# Altium PCB PCB1.PcbDoc
Units mm, origin at the board's own origin, x right, y up, seen from the top; angles counter-clockwise.
Board outline 80 x 43 mm, 2 copper layers (Top Layer, Bottom Layer); 76 components, 65 nets, 258 pads, 118 vias.
Unrouted connection lines stored in the file: 42.
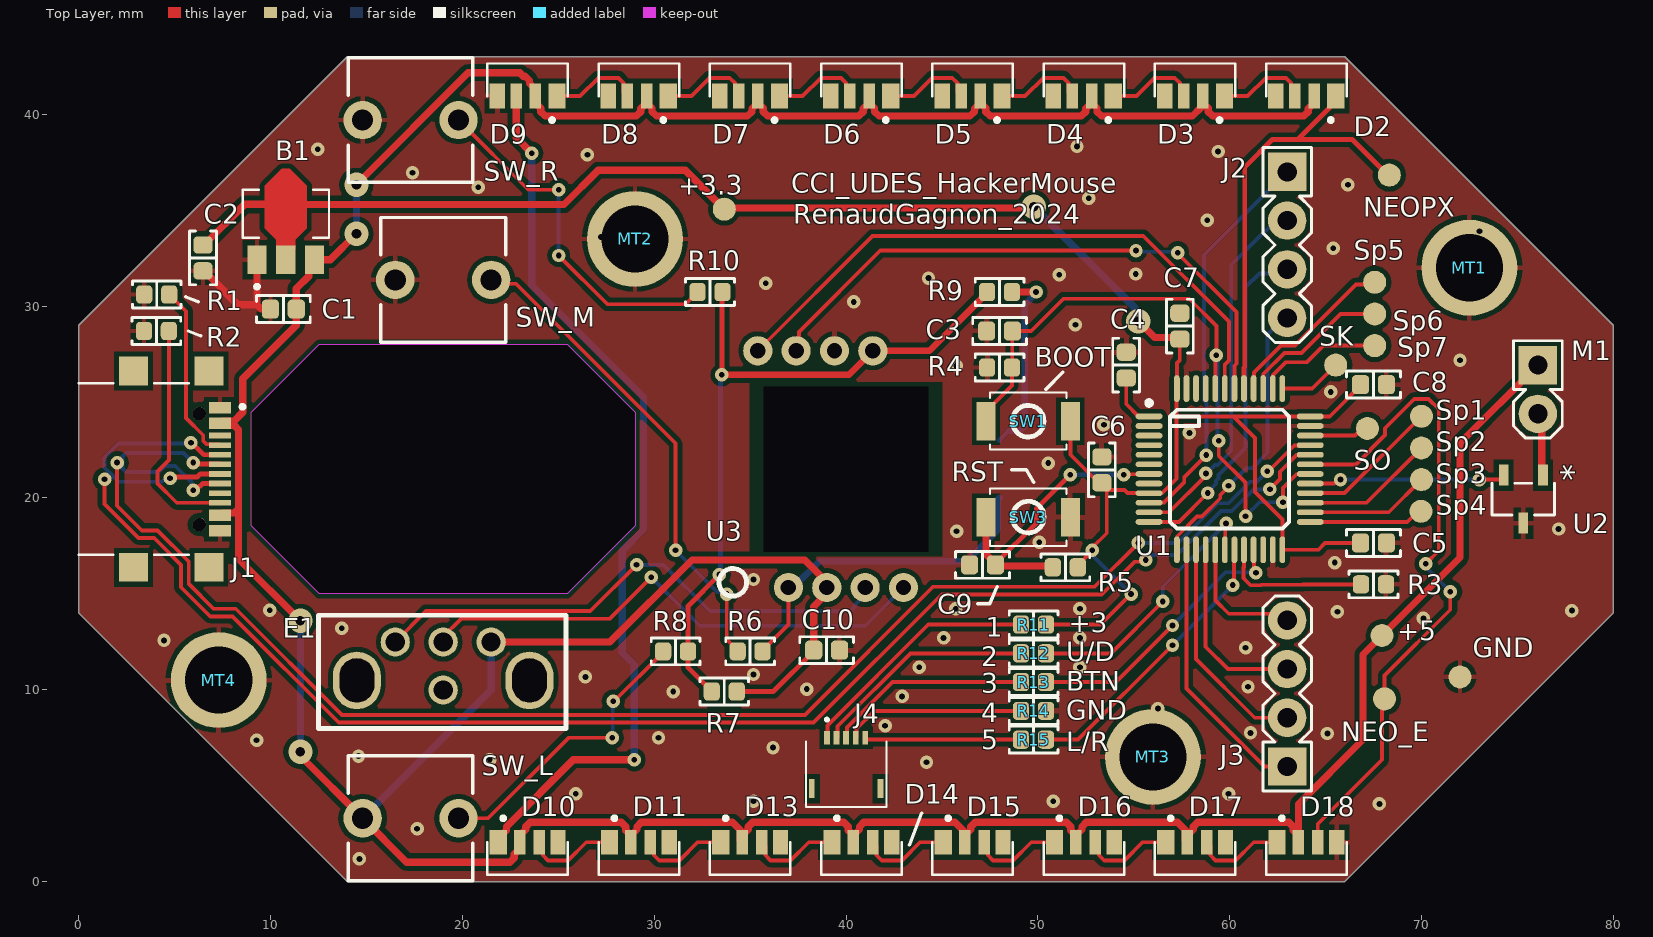
[diagram p0: Top Layer view]
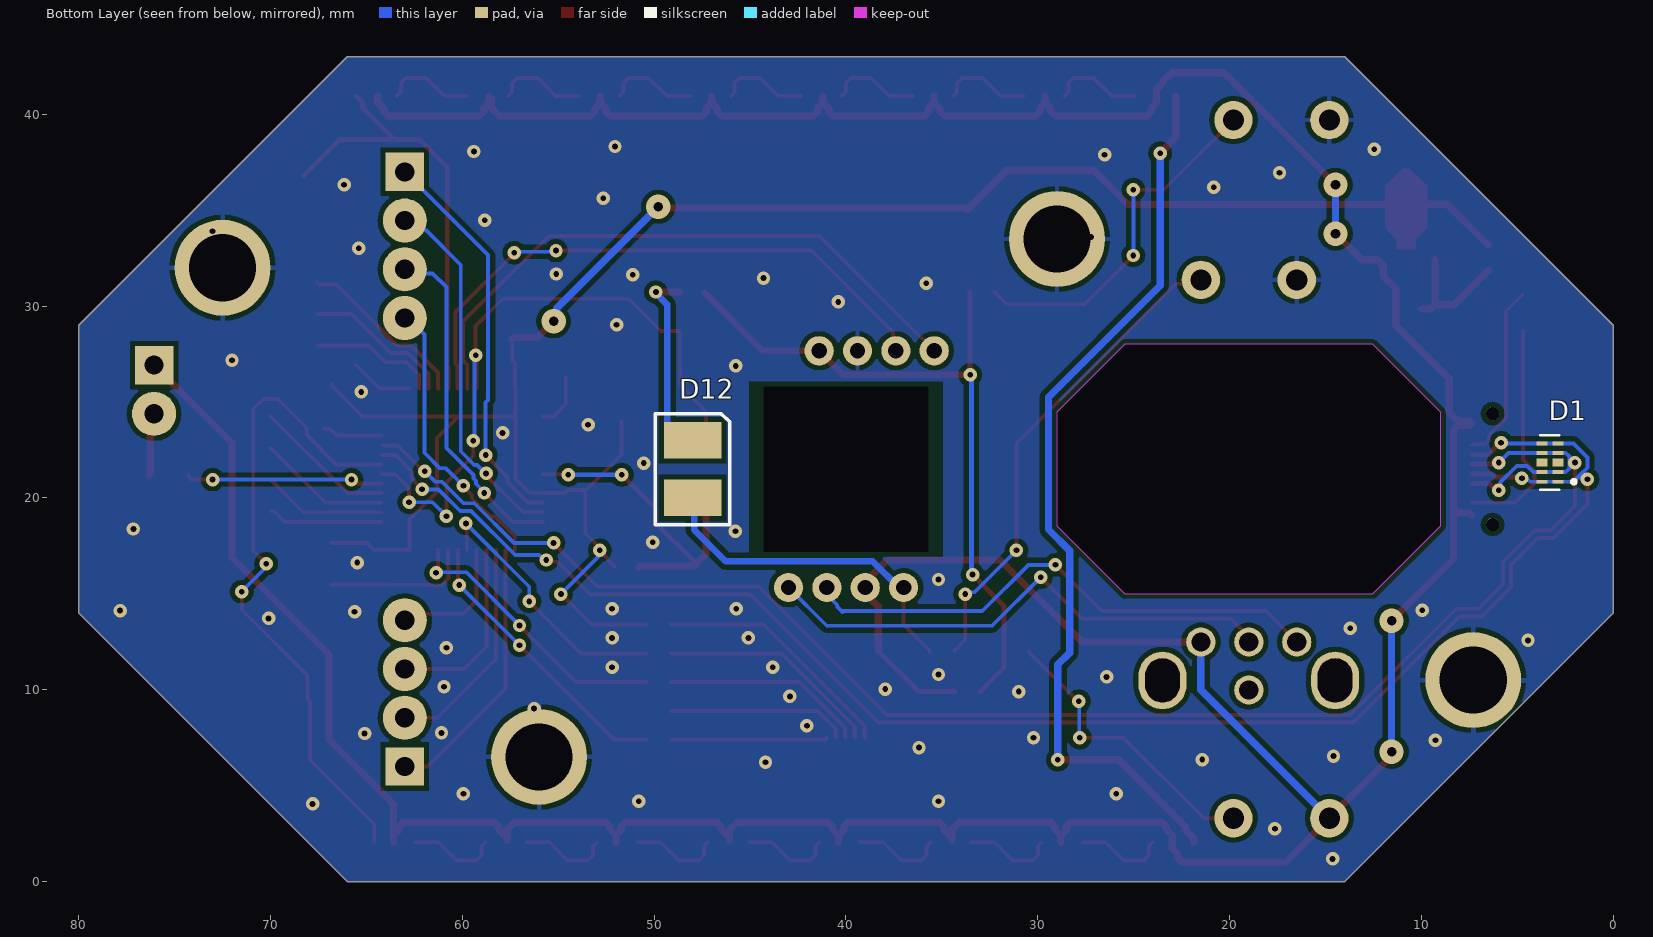
[diagram p1: Bottom Layer view, seen from below]
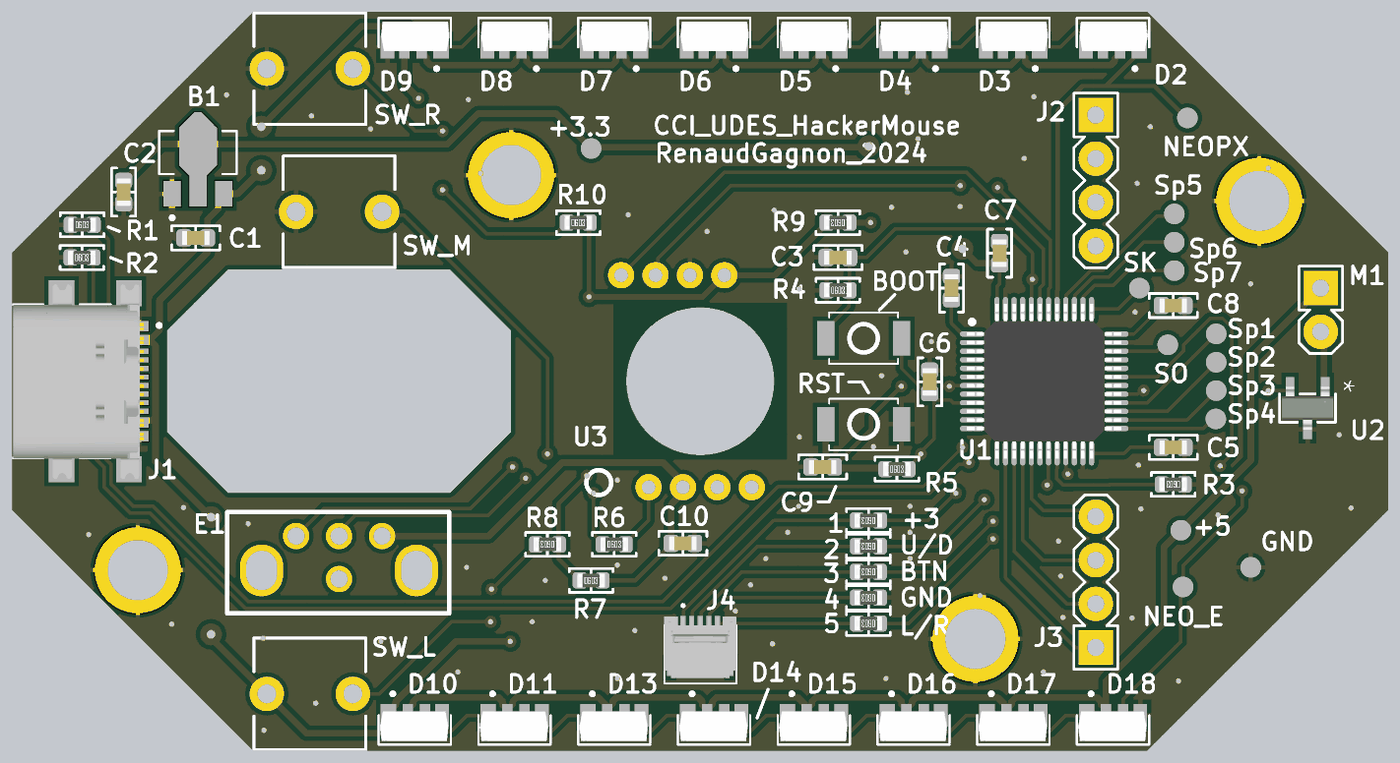
[diagram p2: 3D render of the assembled board from above, using the file's embedded part models]

## Layer stack, top to bottom
Top Solder: solder mask 0.0102, Solder Resist, Dk 3.5
Top Layer: signal copper 0.0356
Dielectric 1: dielectric 0.32, FR-4, Dk 4.8
Bottom Layer: signal copper 0.0356
Bottom Solder: solder mask 0.0102, Solder Resist, Dk 3.5

## Board outline
0,13.999 0,29.001 14,43 66,43 80,29.001 80,13.999 66,0 14,0
cut-out: 9,18.537 9,24.463 12.536,28.001 25.465,28.001 29,24.463 29,18.537 25.464,14.999 12.536,14.999

## Design rules (kind name [scope] priority, off if disabled: settings)
Clearance Clearance_23P [InNet('USB2D_P') vs InNet('USBD_P')] p1: gap=0 ignorepadtopadclearanceinfootprint=FALSE
Clearance Clearance_13P [InNet('USBD_P') vs InNet('USB1D_P')] p2: gap=0 ignorepadtopadclearanceinfootprint=FALSE
Clearance Clearance_23N [InNet('USB2D_N') vs InNet('USBD_N')] p3: gap=0 ignorepadtopadclearanceinfootprint=FALSE
Clearance Clearance_13N [InNet('USB1D_N') vs InNet('USBD_N')] p4: gap=0 ignorepadtopadclearanceinfootprint=FALSE
Clearance Clearance_12P [InNet('USB1D_P') vs InNet('USB2D_P')] p5: gap=0 ignorepadtopadclearanceinfootprint=FALSE
Clearance Clearance_12N [InNet('USB1D_N') vs InNet('USB2D_N')] p6: gap=0 ignorepadtopadclearanceinfootprint=FALSE
Clearance [All] p7: gap=0.254 ignorepadtopadclearanceinfootprint=FALSE except(0: Arc-Hole Track-Hole SMDPad-Hole THPad-Hole Via-Hole Fill-Hole Poly-Hole Region-Hole Text-Hole; 0.2: Arc-Arc Arc-Track Arc-SMDPad Arc-THPad Arc-Via Track-Track Track-SMDPad Track-THPad Track-Via SMDPad-SMDPad THPad-THPad)
ComponentClearance [All] p1: gap=0.1 collisioncheckmode=3 verticalgap=0.254 showdistances=FALSE
DiffPairsRouting DiffPair_DiffPairsRouting [InDifferentialPair ('USBD')] p1: maxlimit=0.254 minlimit=0.2 mostfreqgap=0.254 toplayer_minwidth=0.2 toplayer_maxwidth=0.381 toplayer_prefwidth=0.254 bottomlayer_minwidth=0.2 bottomlayer_maxwidth=0.381 bottomlayer_prefwidth=0.254 maxuncoupledlength=12.7
DiffPairsRouting [All] p2: maxlimit=0.254 minlimit=0.2 mostfreqgap=0.254 toplayer_minwidth=0.2 toplayer_maxwidth=0.381 toplayer_prefwidth=0.254 bottomlayer_minwidth=0.2 bottomlayer_maxwidth=0.381 bottomlayer_prefwidth=0.254 maxuncoupledlength=12.7
HoleSize [All] p1: absolutevalues=TRUE maxlimit=5.08 minlimit=0.3 maxpercent=80.000 minpercent=20.000
MatchedLengths DiffPair_MatchedLengths [InDifferentialPair ('USBD')] p1: tolerance=25.4 checknetsindiffpair=FALSE checkdiffpairvsdiffpair=TRUE checkxsignals=TRUE checkothers=TRUE
MinimumSolderMaskSliver [All] p1: minsoldermaskwidth=0.127
PasteMaskExpansion PasteMaskExpansion_1 [All] p1: expansion=0
PolygonConnect [All] p1: thpad.connectstyle=Relief thpad.reliefconductorwidth=0.254 thpad.reliefentries=4 thpad.polygonreliefangle="90 Angle" thpad.airgapwidth=0.254 smdpad.connectstyle=Relief smdpad.reliefconductorwidth=0.254 smdpad.reliefentries=4 smdpad.polygonreliefangle="90 Angle" smdpad.airgapwidth=0.254 via.connectstyle=Direct via.reliefconductorwidth=0.254 via.reliefentries=4 via.polygonreliefangle="90 Angle" via.airgapwidth=0.254
RoutingVias [All] p1: holewidth=0.711 width=1.27 viastyle="Through Hole" minholewidth=0.3 minwidth=0.5 maxholewidth=0.711 maxwidth=1.27
ShortCircuit ShortCircuit_USBP [InNetClass('USBP') vs InNetClass('USBP')] p1: allowed=TRUE
ShortCircuit ShortCircuit_USBN [InNetClass('USBN') vs InNetClass('USBN')] p2: allowed=TRUE
ShortCircuit [All] p3: allowed=FALSE
SilkToSolderMaskClearance [IsPad] p1: minsilkscreentomaskgap=0 clearancetoexposedcopper=TRUE
SolderMaskExpansion [IsVia] p1: expansion=0.102 istentingtop=TRUE
Width [All] p1: maxlimit=0.381 minlimit=0.2 preferedwidth=0.2 minimp=50.000000 maximp=50.000000 favimp=50.000000
23 further rules are at their usual default settings.

## Classes and differential pairs
component class Sheet2: C10 D2 D3 D4 D5 D6 D7 D8 D9 D10 D11 D12 D13 D14 D15 D16 D17 D18 E1 NEO_E R6 R7 R8 R9 R10 SW_L SW_M SW_R U3
component class Sheet1: +3.3 +5 B1 C1 C2 C3 C4 C5 C6 C7 C8 C9 D1 GND J1 J2 J3 J4 M1 MT1 MT2 MT3 MT4 NEOPX R1 R2 R3 R4 R5 R11 R12 R13 R14 R15 SK SO Sp1 Sp2 Sp3 Sp4 Sp5 Sp6 Sp7 SW1 SW3 SWCLK1 SWDIO1 U1 U2

## Components (designator, comment, footprint, x,y, rotation, side; value= is the part's Value field where it differs from the comment)
+3.3 "TestPoint" TP2020#1 33.655,35.052 r90 top
+5 "TestPoint" TP2020#1 67.945,12.827 r0 top
B1 "AZ1117CR-3.3TRG1" SOT89-3 10.795,34.417 r90 top
C1 "10uF 6.3V" "CAP 0603_1608" 10.668,29.845 r0 top value=10uF
C2 "22uF 6.3V" "CAP 0603_1608" 6.477,32.512 r90 top value=22uF
C3 "0.1µF" "CAP 0603_1608" 48.006,28.702 r0 top
C4 "0.1µF" "CAP 0603_1608" 54.61,26.924 r270 top
C5 "0.1µF" "CAP 0603_1608" 67.5,17.653 r180 top
C6 "0.1µF" "CAP 0603_1608" 53.34,21.463 r270 top
C7 "0.1µF" "CAP 0603_1608" 57.404,28.956 r270 top
C8 "0.1µF" "CAP 0603_1608" 67.5,25.908 r180 top
C9 "0.1µF" "CAP 0603_1608" 47.117,16.51 r0 top
C10 "0.1µF" "CAP 0603_1608" 38.989,12.065 r180 top
D1 "TPD4E02B04DQAR" DIO_TPD4E02B04DQAR 3.302,21.844 r0 bottom
D2 "WS2812B" WS2812B4020 64,41.8 r0 top
D3 "WS2812B" WS2812B4020 58.2,41.8 r0 top
D4 "WS2812B" WS2812B4020 52.4,41.8 r0 top
D5 "WS2812B" WS2812B4020 46.6,41.8 r0 top
D6 "WS2812B" WS2812B4020 40.8,41.8 r0 top
D7 "WS2812B" WS2812B4020 35,41.8 r0 top
D8 "WS2812B" WS2812B4020 29.2,41.8 r0 top
D9 "WS2812B" WS2812B4020 23.4,41.8 r0 top
D10 "WS2812B" WS2812B4020 23.4,1.2 r180 top
D11 "WS2812B" WS2812B4020 29.2,1.2 r180 top
D12 "LED" MOUSE_LED 48,21.5 r270 bottom locked
D13 "WS2812B" WS2812B4020 35,1.2 r180 top
D14 "WS2812B" WS2812B4020 40.8,1.2 r180 top
D15 "WS2812B" WS2812B4020 46.6,1.2 r180 top
D16 "WS2812B" WS2812B4020 52.4,1.2 r180 top
D17 "WS2812B" WS2812B4020 58.2,1.2 r180 top
D18 "WS2812B" WS2812B4020 64,1.2 r180 top
E1 "ENCODER" TTC_ENCODER 21.5,12.486 r180 top locked
GND "TestPoint" TP2020#1 72.009,10.668 r90 top
J1 "GSB1C41110SSHR" AMPHENOL_GSB1C41110SSHR 3.683,21.5 r270 top locked
J2 "4 pin header" "4 pin header" 63,37 r270 top
J3 "4 pin header" "4 pin header" 63,6 r90 top
J4 "503480-0500" 5034800500 40.005,5.893 r0 top
M1 "motor" "2 pin header" 76.073,26.924 r270 top
MT1 "M3" M3_MT_HOLE#1 72.771,32.004 r0 top
MT2 "M3" M3_MT_HOLE#2 29.083,33.655 r0 top
MT3 "M3" M3_MT_HOLE#3 56,6.5 r0 top
MT4 "M3" M3_MT_HOLE#4 7.239,10.541 r0 top
NEO_E "TestPoint" TP2020#1 68.072,9.525 r90 top
NEOPX "TestPoint" TP2020#1 68.326,36.83 r90 top
R1 "560R" "RES 0603_1608" 4.064,30.607 r0 top value=560
R2 "560R" "RES 0603_1608" 4.049,28.702 r0 top value=560
R3 "10k" "RES 0603_1608" 67.5,15.494 r180 top
R4 "10k" "RES 0603_1608" 48.006,26.797 r0 top
R5 "10k" "RES 0603_1608" 51.435,16.383 r0 top
R6 "30k" "RES 0603_1608" 35,12 r0 top
R7 "1M" "RES 0603_1608" 33.655,9.906 r0 top
R8 "30k" "RES 0603_1608" 31.115,12 r180 top
R9 "33R" "RES 0603_1608" 48.006,30.734 r180 top value=33
R10 "30k" "RES 0603_1608" 32.908,30.734 r0 top
R11 "0R" "RES 0603_1608" 49.778,13.397 r180 top value=0
R12 "0R" "RES 0603_1608" 49.778,11.897 r180 top value=0
R13 "0R" "RES 0603_1608" 49.778,10.397 r180 top value=0
R14 "0R" "RES 0603_1608" 49.778,8.897 r180 top value=0
R15 "0R" "RES 0603_1608" 49.778,7.397 r180 top value=0
SK "TestPoint" TP2020#1 65.532,26.924 r90 top
SO "TestPoint" TP2020#1 67.183,23.622 r90 top
Sp1 "TestPoint" TP2020#2 69.596,24.257 r90 top
Sp2 "TestPoint" TP2020#2 69.596,22.606 r90 top
Sp3 "TestPoint" TP2020#3 69.469,20.955 r90 top
Sp4 "TestPoint" TP2020#2 69.573,19.304 r90 top
Sp5 "TestPoint" TP2020#1 67.564,31.242 r90 top
Sp6 "TestPoint" TP2020#1 67.564,29.591 r90 top
Sp7 "TestPoint" TP2020#1 67.564,27.94 r90 top
SW1 "SPST_BUTTON" 3x4mmBTN 49.5,24 r0 top locked
SW3 "SPST_BUTTON" 3x4mmBTN 49.5,19 r180 top locked
SW_L "SPST_BUTTON" KailhBtn 14.8,3.3 r0 top
SW_M "SPST_BUTTON" KailhBtn 16.5,31.369 r0 top locked
SW_R "SPST_BUTTON" KailhBtn 19.8,39.7 r180 top
U1 "CH32V203CxT6" LQFP48 60,21.5 r0 top locked
U2 "DMN2230UQ-7" DMN2230UQ_DIO-M 75.311,19.939 r270 top
U3 "PAW3515DB" PAW3515DB 40,21.5 r180 top locked

## Footprints (in the part's own frame and the unit in brackets; to place one, negate y for a bottom-side part, rotate by r counter-clockwise, add the part's x,y. Pads: shape width x height; smd on the part's side, far side on the other; paste and mask are expansions set on the pad)
"2 pin header" [mm]
  rect 2x2 hole 1: 1(0,0)
  round 2 / inner round 2.3 / far side round 2.3 hole 1: 2(2.54,0)
  silkscreen extent -1.27,-1.27 3.81,1.27
3x4mmBTN [mm]
  rect 1x2 smd: 1(-2.2,0) 2(2.2,0)
  silkscreen extent -2,-1.49 2,1.5
"4 pin header" [mm]
  rect 2x2 hole 1: 1(0,0)
  round 2 / inner round 2.3 / far side round 2.3 hole 1: 2(2.54,0) 3(5.08,0) 4(7.62,0)
  silkscreen extent -1.27,-1.27 8.89,1.27
5034800500 [mm]
  rect 0.3x0.7 smd: 1(-1,1.6) 2(-0.5,1.6) 3(0,1.6) 4(0.5,1.6) 5(1,1.6)
  rect 0.3x1 smd: MP1(-1.79,-1.05) MP2(1.79,-1.05)
  silkscreen extent -2.1,-2 2.1,2.6, body extent -2.1,-1.68 2.1,1.92, height 1.87
AMPHENOL_GSB1C41110SSHR [mm]
  rect 0.6x1.15 smd mask+0.05: A1_B12(-3.2,3.68) A4_B9(-2.4,3.68) B1_A12(3.2,3.68) B4_A9(2.4,3.68)
  rect 0.3x1.15 smd mask+0.05: A5(-1.25,3.68) A6(-0.25,3.68) A7(0.25,3.68) A8(1.25,3.68) B5(1.75,3.68) B6(0.75,3.68) B7(-0.75,3.68) B8(-1.75,3.68)
  rect 1.5x1.5 smd: SH1(-5.12,3.105) SH2(5.12,3.105) SH3(-5.12,-0.825) SH4(5.12,-0.825)
  round 0.7 hole 0.7 unplated: ""(-2.89,2.605) ""(2.89,2.605)
  silkscreen extent -4.47,-3.67 4.47,4.95, body extent -5.64,-3.63 5.7,3.97, height 3.18
"CAP 0603_1608" [mm] "Chip Capacitor, 2-Leads, Body 1.60x0.80mm, IPC Medium Density"
  rrect50% 0.9x1 smd: 1(-0.675,0) 2(0.675,0)
  silkscreen extent -1.4,-0.7 1.4,0.7, body extent -0.8,-0.41 0.8,0.41, height 0.82
DIO_TPD4E02B04DQAR [mm]
  rect 0.565x0.2 smd mask+0: 1(-0.417,1) 2(-0.417,0.5) 4(-0.417,-0.5) 5(-0.417,-1) 6(0.417,-1) 7(0.417,-0.5) 9(0.417,0.5) 10(0.417,1)
  rect 0.565x0.4 smd paste-1 mask+0: 3(-0.417,0) 8(0.417,0)
  silkscreen extent -1.35,-1.42 0.5,1.42, body extent -0.5,-1.25 0.5,1.25, height 0.55
DMN2230UQ_DIO-M [mil]
  rect 43.5x20 smd paste+0 mask+0: 1(-49.25,40.35) 2(-49.25,-40.35) 3(49.25,0)
  silkscreen extent -33,-64 33,64, body extent -49,-59 49,59, height 43
KailhBtn [mm]
  round 2 hole 1.1: 1(0,0) 2(5,0)
  silkscreen extent -0.75,-3.25 5.75,3.25
LQFP48 [mm] "CQFP, 48-Leads, Body 9.00x9.00mm, Pitch 0.50mm, IPC Medium Density"
  oval 1.4x0.3 smd: 1(-4.2,2.75) 2(-4.2,2.25) 3(-4.2,1.75) 4(-4.2,1.25) 5(-4.2,0.75) 6(-4.2,0.25) 7(-4.2,-0.25) 8(-4.2,-0.75) 9(-4.2,-1.25) 10(-4.2,-1.75) 11(-4.2,-2.25) 12(-4.2,-2.75) 25(4.2,-2.75) 26(4.2,-2.25) 27(4.2,-1.75) 28(4.2,-1.25) 29(4.2,-0.75) 30(4.2,-0.25) 31(4.2,0.25) 32(4.2,0.75) 33(4.2,1.25) 34(4.2,1.75) 35(4.2,2.25) 36(4.2,2.75)
  oval 0.3x1.4 smd: 13(-2.75,-4.2) 14(-2.25,-4.2) 15(-1.75,-4.2) 16(-1.25,-4.2) 17(-0.75,-4.2) 18(-0.25,-4.2) 19(0.25,-4.2) 20(0.75,-4.2) 21(1.25,-4.2) 22(1.75,-4.2) 23(2.25,-4.2) 24(2.75,-4.2) 37(2.75,4.2) 38(2.25,4.2) 39(1.75,4.2) 40(1.25,4.2) 41(0.75,4.2) 42(0.25,4.2) 43(-0.25,4.2) 44(-0.75,4.2) 45(-1.25,4.2) 46(-1.75,4.2) 47(-2.25,4.2) 48(-2.75,4.2)
  silkscreen extent -4.32,-3.1 3.1,3.57, body extent -4.5,-4.5 4.5,4.5, height 1.4
M3_MT_HOLE#1 [mm]
  round 5 hole 3.5 paste+140 mask+0.102: 1(-0.271,-0.004)
M3_MT_HOLE#2 [mm]
  round 5 hole 3.5 paste+140 mask+0.102: 1(-0.083,-0.155)
M3_MT_HOLE#3 [mm]
  round 5 hole 3.5 paste+140 mask+0.102: 1(0,0)
M3_MT_HOLE#4 [mm]
  round 5 hole 3.5 paste+140 mask+0.102: 1(0.061,-0.041)
MOUSE_LED [mm] "SODFL, 2-Leads, Body 2.50x4.70mm, IPC Medium Density"
  rect 1.9x3 smd: A(1.5,0) K(-1.5,0)
  silkscreen extent -2.9,-1.95 2.9,1.95, body extent -2.35,-1.35 2.35,1.35, height 1.1
PAW3515DB [mil]
  round 60 hole 31.5: 1(118.23,242.99) 2(39.49,242.99) 3(-39.25,242.99) 4(-117.99,242.99) 5(-55.12,-242.99) 6(23.62,-242.99) 7(102.36,-242.99) 8(181.1,-242.99)
  round 60 hole 338.58 square unplated: 20(0,0)
  silkscreen extent 204,204 261,261
"RES 0603_1608" [mm] "Chip Resistor, 2-Leads, Body 1.60x0.80mm, IPC Medium Density"
  rrect50% 0.85x0.95 smd: 1(-0.65,0) 2(0.65,0)
  silkscreen extent -1.27,-0.7 1.27,0.7, body extent -0.8,-0.4 0.8,0.4, height 0.45
SOT89-3 [mm]
  rect 1.5x1 smd mask+0: 1(-2,1.5) 3(-2,-1.5)
  rect 1.5x1 smd paste-2 mask+0: 2(-2,0)
  Top Layer region: 2.75,0.2 2.75,-0.2 1.85,-1.1 -0.35,-1.1 -0.95,-0.5 -1.448,-0.5 -1.448,0.5 -0.95,0.5 -0.35,1.1 1.85,1.1
  silkscreen extent -3.5,-2.25 1.66,2.25
TP2020#1 [mm]
  round 1.2 smd: TP(0,0)
TP2020#2 [mm]
  round 1.2 smd: TP(0,-0.404)
TP2020#3 [mm]
  round 1.2 smd: TP(0,-0.531)
TTC_ENCODER [mm]
  round 1.524 hole 1: 1(5,0) 2(2.5,0) 3(0,0) mt(2.5,2.5)
  rrect100% 2.5x3 hole 1.8 slot 2.3 at 90 deg: mt(-2,2) mt(7,2)
  silkscreen extent -3.9,-1.4 9,4.5
WS2812B4020 [mm]
  rect 0.9x1.3 smd: 1(1.53,-0.85)
  rect 0.6x1.3 smd: 2(0.41,-0.85) 3(-0.595,-0.85)
  rect 0.8x1.3 smd: 4(-1.587,-0.85)
  silkscreen extent -2.1,-2.2 2.1,0.85, body extent -1.96,-1.09 2.02,0.64, height 2.01

## Part data
+3.3 +5 GND NEO_E NEOPX SK SO Sp1 Sp2 Sp3 Sp4 Sp5 Sp6 Sp7: library part JMP-RTZL7I, "PC TEST POINT MINIATURE", Manufacturer="Keystone Electronics", Supplier Part Number 1=36-5015TR-ND, Part Number=JMP-RTZL7I, SCH_Comment="5015 TestPoint", Supplier 1=DigiKey
B1: library part TRS-RTZP45, "3.3v LDO Voltage regulator", JLC PartNumber=C460428, Manufacturer_Name=Torex, Manufacturer_Part_Number=XC6206P331MR-G, Mouser Part Number=865-XC6206P331MR-G, Supplier Part Number 1=AZ1117CR-3.3TRG1DICT-ND, Datasheet Link=https://www.torexsemi.com/file/xc6206/XC6206.pdf, Geometry.Height=1.3mm, Mouser Price/Stock=https://www.mouser.co.uk/ProductDetail/Torex-Semiconductor/XC6206P331MR-G?qs=AsjdqWjXhJ%252B7jjWBpr1yow%3D%3D, Part Number=TRS-RTZP45, SCH_Comment=AZ1117CR33, Supplier 1=Digi-key
C1: library part CAP0603-RU10OA, "CAP CER 10uF", JLC PartNumber=C19702, Manufacturer=YAGEO, Rated Voltage=6.3V, Supplier Part Number 1=311-1781-1-ND, Tolerance=±10%, Part Number=CAP0603-RU10OA, SCH_Comment="10uF 6.3V", Size="0603 (1608 Metric)", Supplier 1=Digi-Key
C2: library part CAP0603-SAQ85G, "6.3V 22uF X5R ±20% 0603 Multilayer Ceramic Capacitors MLCC - SMD/SMT ROHS", JLC PartNumber=C59461, Manufacturer="Samsung Electro-Mechanics", Rated Voltage=6.3V, Tolerance=±20%, Part Number=CAP0603-SAQ85G, SCH_Comment="22uF 6.3V", Supplier 1=Digi-Key
C3 C4 C5 C6 C7 C8 C9 C10: library part CAP-RTZP49, "CAP CER SMD 0603 .1UF 10% X7R 25", JLC PartNumber=C14663, Manufacturer="Samsung Electro-Mechanics", Rated Voltage=50V, Supplier Part Number 1=1276-CL10B104KB8NNNLCT-ND, Tolerance=±10%, Part Number=CAP-RTZP49, SCH_Comment=0.1µF, Size="0603 (1608 Metric)", Supplier 1=Digi-key
D1: library part DIO-RTZP4I, "ESD protection diode", JLC PartNumber=C106794, Package="USON-10 Texas Instruments", Supplier Part Number 1=296-43875-2-ND, Check_prices=https://www.snapeda.com/parts/TPD4E02B04DQAR/Texas%20Instruments/view-part/576424/?ref=eda, Digi-Key_Part_Number=296-43875-1-ND, MF="Texas Instruments", MP=TPD4E02B04DQAR, Part Number=DIO-RTZP4I, Purchase-URL=https://pricing.snapeda.com/search/part/TPD4E02B04DQAR/?ref=eda, SCH_Comment=TPD4E02B04, SnapEDA_Link=https://www.snapeda.com/parts/TPD4E02B04DQAR/Texas%20Instruments/view-part/576424/?ref=snap, Supplier 1=Digikey
D2 D3 D4 D5 D6 D7 D8 D9 D10 D11 D13 D14 D15 D16 D17 D18: library part DIO4020-RYIG4M, "NEOPIXEL RGB LED", JLC PartNumber=C3647024, Manufacturer=Worldsemi, Supplier Part Number 1=C2761795, Part Number=DIO4020-RYIG4M, SCH_Comment=WS2812B, Supplier 1=LCSC
D12: library part "Optical mouse diode", "Optical mouse diode", Part Number="Optical mouse diode", SCH_Comment="Optical mouse diode"
E1: library part MouseEncoder, "Mouse wheel encoder", Part Number=MouseEncoder, SCH_Comment=MSENC, Supplier 1=Aliexpress, Supplier Part Number 1=https://fr.aliexpress.com/item/1005007019311898.html
J1: library part USB_16p_SMT, "16 pin usb type c right angle female connector", Manufacturer=Amphenol, Package=None, Check_prices=https://www.snapeda.com/parts/GSB1C41110SSHR/Amphenol/view-part/?ref=eda, MF="Amphenol Canada", MP=GSB1C41110SSHR, Part Number=USB_16p_SMT, SCH_Comment=USB-C, SnapEDA_Link=https://www.snapeda.com/parts/GSB1C41110SSHR/Amphenol/view-part/?ref=snap
J2 J3: library part 4PinHeader, Manufacturer="Sullins Connector Solutions", Supplier Part Number 1=S7002-ND, Part Number=4PinHeader, SCH_Comment="4 pin header", Supplier 1=Digi-Key
J4: "Connector", Manufacturer_Name=Molex, Mouser Part Number=538-503480-0500, Height=1.3mm, Manufacturer_Part_Number=503480-0500, Mouser Price/Stock=https://www.mouser.co.uk/ProductDetail/Molex/503480-0500?qs=gt1LBUVyoHk%2Fe71glqHWvw%3D%3D
M1: library part VibrationMotor, "Vibrating motor", Manufacturer=ChingChong, Part Number=VibrationMotor, SCH_Comment=Vibrator
MT1 MT2 MT3 MT4: library part NSP-M3, "M3 pounting screw", Part Number=NSP-M3, SCH_Comment=M3
R1 R2: library part RES-RTZP5N, "RES SMD 560 OHM 1% 1/10W 0603", JLC PartNumber=C23204, Manufacturer="Panasonic Electronic Components", Operating Temperature="-55°C ~ 155°C", Power (Watts)="0.1W, 1/10W", Supplier Part Number 1=P560HCT-ND, Temperature Coefficient=±100ppm/°C, Tolerance=±1%, Composition="Thick Film", Features="Automotive AEC-Q200", Part Number=RES-RTZP5N, SCH_Comment=560R, Size="0603 (1608 Metric)", Supplier 1=Digi-key
R3 R4 R5: library part RES-RTZP5R, "RES SMD 10K OHM 1% 1/10W 0603", JLC PartNumber=C25804, Manufacturer="Panasonic Electronic Components", Operating Temperature="-55°C ~ 155°C", Power (Watts)="0.1W, 1/10W", Supplier Part Number 1=P10.0KHCT-ND, Temperature Coefficient=±100ppm/°C, Tolerance=±1%, Composition="Thick Film", Features="Automotive AEC-Q200", Part Number=RES-RTZP5R, SCH_Comment=10k, Size="0603 (1608 Metric)", Supplier 1=Digi-key
R6 R8 R10: library part ERJ-3EKF3002V, "RES SMD 30K OHM 1% 1/10W 0603", Manufacturer="Panasonic Electronic Components", Operating Temperature="-55°C ~ 155°C", Power (Watts)="0.1W, 1/10W", Supplier Part Number 1=P30.0KHCT-ND, Temperature Coefficient=±100ppm/°C, Tolerance=±1%, Composition="Thick Film", Features="Automotive AEC-Q200", Part Number=ERJ-3EKF3002V, SCH_Comment=30k, Size="0603 (1608 Metric)", Supplier 1=Digi-key
R7: library part ERJ-3EKF1004V, "RES SMD 1M OHM 1% 1/10W 0603", Manufacturer="Panasonic Electronic Components", Operating Temperature="-55°C ~ 155°C", Power (Watts)="0.1W, 1/10W", Supplier Part Number 1=P1.00MHCT-ND, Temperature Coefficient=±100ppm/°C, Tolerance=±1%, Composition="Thick Film", Features="Automotive AEC-Q200", Part Number=ERJ-3EKF1004V, SCH_Comment=1M, Size="0603 (1608 Metric)", Supplier 1=Digi-key
R9: library part ERJ-3EKF33R0V, "RES SMD 33 OHM 1% 1/10W 0603", Manufacturer="Panasonic Electronic Components", Operating Temperature="-55°C ~ 155°C", Power (Watts)="0.1W, 1/10W", Supplier Part Number 1=P33.0HCT-ND, Temperature Coefficient=±100ppm/°C, Tolerance=±1%, Composition="Thick Film", Features="Automotive AEC-Q200", Part Number=ERJ-3EKF33R0V, SCH_Comment=33R, Size="0603 (1608 Metric)", Supplier 1=Digi-key
R11 R12 R13 R14 R15: library part ERJ-3GEY0R00V, "RES SMD 0 OHM JUMPER 1/10W 0603", Manufacturer="Panasonic Electronic Components", Operating Temperature="-55°C ~ 155°C", Power (Watts)=1/10W, Supplier Part Number 1=P0.0GCT-ND, Temperature Coefficient=±200ppm/°C, Tolerance=--, Features="Automotive AEC-Q200", Part Number=ERJ-3GEY0R00V, SCH_Comment=0R, Size="0603 (1608 Metric)", Supplier 1=Digi-key
SW1 SW3: library part BTN-000001, "50mA Brick nogging SPST 12V SMD,3x4mm Tactile Switches ROHS", JLC PartNumber=C455280, Manufacturer="XUNPU / XUNPU", Supplier Part Number 1=2449-CS1213AGF160DKR-ND, Part Number=BTN-000001, SCH_Comment=Button, Supplier 1=DigiKey
SW_L SW_M SW_R: library part MouseClickBtn, "Bouton of mouse click", Part Number=MouseClickBtn, SCH_Comment=MSBTN, Supplier 1=Aliexpress, Supplier Part Number 1=https://fr.aliexpress.com/item/1005005271018166.html
U1: library part MCU-RV4Q62, "32bit RISC-V MCU 144MHz", JLC PartNumber=C3001172, Manufacturer=WCH-IC, Supplier Part Number 1=CH32V203C8T6, Part Number=MCU-RV4Q62, SCH_Comment=CH32V203CxT6, Supplier 1=Alibaba
U2: "NPN mosfet", Mfr_Name="Diodes Inc", Part Number=DMN2230UQ-7, SCH_Comment="Mosfet N"
U3: "Optical mouse sensor", Part Number=PAW3515DB, SCH_Comment=PAW3515DB, Supplier 1=Aliexpress, Supplier Part Number 1=https://fr.aliexpress.com/item/4001098948441.html

## Via types
v1: diameter 0.7, hole 0.3, Top Layer to Bottom Layer, tented both sides, 112 vias
v2: diameter 1.27, hole 0.5, Top Layer to Bottom Layer, tented both sides, 6 vias

## Nets (pads, with @x,y where several pads share a name; then routed paths per layer and width w, separated by ;. In a path a pad name is that pad's centre, name@x,y a point inside that pad or via, vN(x,y) a via of type N, cw(c..) or ccw(c..) an arc to the next point about the centre after c; other vN are vias at no path point)
+3.3: +3.3.TP B1.2 C2.2 C5.2 C6.2 C7.2 C8.2 R5.2 R11.1 SW1.2 U1.9 U1.24 U1.36 U1.48 | length 108.1
  Top Layer w0.2: R11.1 53.275,13.397 v1(54.864,14.986) ; SW1.2 51.7,22.251 53.544,20.407 C6.2@53.594,20.407 ; R5.2@52.341,16.639 R5.2 52.085,16.479 52.832,17.226 v1(52.832,17.272) 52.832,17.399 53.594,18.161 C6.2@53.594,20.407 ; C7.2 57.404,27.186 57.25,27.032 U1.48 57.238,25.688 57.238,24.257 ; C5.2 64.978,17.653 64.625,17.3 U1.24 62.75,18.881 61.318,20.313 61.318,23.13 60.198,24.25 ; C8.2 66.825,25.858 65.217,24.25 U1.36 60.198,24.25 ; C6.2@53.594,20.407 54.525,20.407 54.682,20.25 U1.9 55.819,20.269 56.506,20.269 57.238,21.002 57.238,24.257 ; 57.238,24.257 57.245,24.25 60.198,24.25
  Top Layer w0.381: C2.2 6.527,33.187 8.646,35.306 10.795,35.306 10.804,35.297 25.295,35.297 27.082,37.084 31.623,37.084 +3.3.TP 33.718,35.115 49.721,35.115 v2(49.784,35.179) ; v2(55.245,29.21) 55.257,29.21 56.104,28.363 57.322,28.363 C7.2
  Bottom Layer w0.2: v1(52.832,17.272) 52.928,17.176 52.928,16.922 v1(54.864,14.986)
  Bottom Layer w0.381: v2(49.784,35.179) 55.075,29.888 55.075,29.38 v2(55.245,29.21)
+5: +5.TP B1.3 C1.2 C10.2 D2.2 D3.2 D4.2 D5.2 D6.2 D7.2 D8.2 D9.2 D10.2 D11.2 D13.2 D14.2 D15.2 D16.2 D17.2 D18.2 E1.3 J1.A4_B9 J1.B4_A9 M1.1 R7.2 SW_L.1 U3.2 | length 231.1
  Top Layer w0.254: R7.2 36.205,9.906 38.314,12.015 C10.2
  Top Layer w0.381: J1.B4_A9 7.472,19.209 8.1,19.209 8.328,19.438 ; v2(11.557,6.764) 11.557,6.543 SW_L.1 17.091,1.01 22.482,1.01 22.711,1.238 22.711,1.421 22.99,1.7 D10.2 22.99,2.4 23.304,2.715 23.304,2.862 23.533,3.091 28.282,3.091 28.511,2.862 28.511,2.679 D11.2@28.79,2.4 ; v2(11.557,13.589) 8.328,16.818 8.328,19.438 ; v2(14.478,33.782) 13.113,32.417 B1.3 11.985,32.107 11.985,31.559 11.343,30.917 C1.2 11.343,28.996 8.556,26.209 8.556,24.465 8.1,24.009 7.472,24.009 J1.A4_B9 7.472,23.791 8.1,23.791 8.328,23.562 8.328,19.438 ; v2(14.478,36.322) 14.478,36.344 20.298,42.164 22.987,42.164 23.16,41.991 23.267,41.991 23.495,41.762 23.495,41.615 23.81,41.3 D9.2 23.81,40.6 24.089,40.321 24.089,40.138 24.318,39.909 29.067,39.909 29.295,40.138 29.295,40.285 D8.2@29.61,40.6 ; E1.3 27.689,12.486 31.967,16.764 37.846,16.764 38.997,15.613 U3.2 38.997,15.019 38.314,14.336 C10.2 ; D11.2 D11.2@28.79,2.4 ; D8.2 D8.2@29.61,40.6 ; D13.2@34.481,2.16 34.481,2.692 34.082,3.091 29.333,3.091 29.105,2.862 29.105,2.715 D11.2@28.79,2.4 ; D13.2@34.59,2.4 34.905,2.715 34.905,2.862 35.133,3.091 39.882,3.091 40.111,2.862 40.111,2.679 D14.2@40.39,2.4 ; D7.2 D7.2@35.41,40.6 ; D14.2 D14.2@40.39,2.4 ; D6.2 D6.2@41.21,40.6 ; D15.2@46.081,2.16 46.081,2.692 45.682,3.091 40.933,3.091 40.705,2.862 40.705,2.715 D14.2@40.39,2.4 ; D15.2@46.19,2.4 46.505,2.715 46.505,2.862 46.733,3.091 51.482,3.091 51.711,2.862 51.711,2.679 D16.2@51.99,2.4 ; D5.2 D5.2@47.01,40.6 ; D16.2 D16.2@51.99,2.4 ; D4.2 D4.2@52.81,40.6 ; D17.2@57.681,2.16 57.681,2.692 57.282,3.091 52.533,3.091 52.305,2.862 52.305,2.715 D16.2@51.99,2.4 ; D17.2@57.79,2.4 58.105,2.715 58.105,2.862 58.333,3.091 63.082,3.091 63.311,2.862 63.311,2.679 D18.2@63.59,2.4 ; D3.2@58.501,40.84 58.501,40.343 58.067,39.909 53.318,39.909 53.089,40.138 53.089,40.321 D4.2@52.81,40.6 ; D3.2 58.61,40.6 58.889,40.321 58.889,40.138 59.118,39.909 63.867,39.909 64.095,40.138 64.095,40.285 64.41,40.6 D2.2 ; D18.2 D18.2@63.59,2.4 ; M1.1 72.009,22.86 72.009,16.891 66.954,11.836 66.954,7.402 63.59,4.038 D18.2@63.59,2.4 ; D8.2@29.61,40.6 29.889,40.321 29.889,40.138 30.118,39.909 34.867,39.909 35.096,40.138 35.096,40.285 D7.2@35.41,40.6 ; D7.2@35.41,40.6 35.689,40.321 35.689,40.138 35.918,39.909 40.667,39.909 40.895,40.138 40.895,40.285 D6.2@41.21,40.6 ; D6.2@41.21,40.6 41.489,40.321 41.489,40.138 41.718,39.909 46.467,39.909 46.695,40.138 46.695,40.285 D5.2@47.01,40.6 ; D5.2@47.01,40.6 47.289,40.321 47.289,40.138 47.518,39.909 52.267,39.909 52.495,40.138 52.495,40.285 D4.2@52.81,40.6
  Bottom Layer w0.381: v2(11.557,6.764) v2(11.557,13.589) ; v2(14.478,33.782) v2@14.478,36.195 ; SW_L.1 21.5,10 E1.3
BOOT0: C3.2 R4.2 SW1.1 U1.30 U1.44 | length 34.2
  Top Layer w0.2: SW1.1 47.3,24.5 48.656,25.856 R4.2 48.668,26.809 48.668,28.689 C3.2 49.657,28.702 51.336,30.381 57.896,30.381 59.309,28.968 v1(59.309,27.432) 59.269,27.392 59.269,25.719 U1.44 ; v1(59.436,22.987) 59.436,22.195 60.833,20.798 v1(60.833,19.05) ; v1@62.738,19.812 62.778,19.852 62.778,20.514 63.494,21.231 64.181,21.231 U1.30 ; v1@62.753,19.797 v1(62.778,19.772)
  Bottom Layer w0.2: v1(59.309,27.432) 59.372,27.368 59.372,23.05 v1(59.436,22.987) ; v1(60.833,19.05) 61.555,19.772 v1(62.778,19.772)
BOOT1: R3.2 U1.20 | length 7.8
  Top Layer w0.2: U1.20 60.75,16.4 60.719,16.369 60.719,15.83 60.75,15.799 60.75,15.786 61.066,15.47 61.079,15.47 61.099,15.45 61.638,15.45 61.659,15.47 63.788,15.47 63.812,15.494 R3.2
BTN: R13.1 U1.21 | length 14.6
  Top Layer w0.2: R13.1 54.068,10.397 v1(57.02,13.349) ; U1.21 61.269,17.281 61.269,16.334 61.369,16.235 v1(61.369,16.1)
  Bottom Layer w0.2: v1(57.02,13.349) 59.8,16.129 61.339,16.129 v1(61.369,16.1)
D+_mouse: U1.43 U3.8 | length 32.5
  Top Layer w0.2: U3.8 41.383,33.655 50.038,33.655 55.499,33.655 59.959,29.195 59.959,27.163 59.75,26.954 U1.43
D-_mouse: U1.42 U3.7 | length 31
  Top Layer w0.2: U3.7 37.541,27.813 37.541,28.651 41.783,32.893 v1(55.118,32.893) ; v1(57.292,32.781) 57.292,32.751 60.359,29.684 60.359,26.997 60.25,26.888 U1.42
  Bottom Layer w0.2: v1(55.118,32.893) 55.174,32.837 57.236,32.837 v1(57.292,32.781)
GND: B1.1 C1.1 C2.1 C3.1 C4.1 C5.1 C6.1 C7.1 C8.1 C9.1 C10.1 D1.3 D1.8 D2.4 D3.4 D4.4 D5.4 D6.4 D7.4 D8.4 D9.4 D10.4 D11.4 D13.4 D14.4 D15.4 D16.4 D17.4 D18.4 GND.TP J1.A1_B12 J1.B1_A12 MT1.1 MT2.1 MT3.1 MT4.1 R1.1 R2.1 R3.1 R4.1 R14.1 SW3.1 SW_M.1 SW_R.2 U1.8 U1.23 U1.35 U1.47 U2.3 U3.6 | length 6.7
  Top Layer w0.381: C2.1 6.527,31.837 8.296,30.068 9.295,30.068 ; B1.1 9.295,30.068 ; C1.1 9.518,29.845 9.295,30.068
  other v1: 14.632,1.178 17.638,2.75 67.811,4.045 35.179,4.191 50.8,4.191 25.908,4.572 59.944,4.572 44.196,6.223 21.43,6.357 14.586,6.542 36.195,6.985 9.271,7.366 30.226,7.493 65.101,7.717 61.087,7.747 42.037,8.128 56.261,9.017 42.926,9.652 30.988,9.906 37.949,10.032 60.96,10.16 26.416,10.668 35.179,10.795 43.815,11.176 52.197,11.176 60.833,12.192 4.445,12.573 45.085,12.7 52.197,12.7 13.716,13.208 70.104,13.716 65.618,14.066 77.846,14.126 9.954,14.145 45.72,14.224 52.197,14.224 35.179,15.748 65.482,16.627 50.073,17.688 45.764,18.259 77.152,18.38 50.547,21.817 57.903,23.391 53.445,23.814 65.278,25.527 45.749,26.883 72.009,27.178 51.959,29.026 40.398,30.217 35.811,31.189 44.301,31.461 51.12,31.632 55.108,31.675 65.405,33.02 27.222,33.605 73.025,33.909 58.831,34.479 52.661,35.618 20.828,36.195 66.167,36.322 17.399,36.957 26.517,37.895 59.401,38.062 12.465,38.172 52.044,38.323
L/R: R15.1 U1.19 | length 15
  Top Layer w0.2: R15.1 52.101,7.397 v1(57.023,12.319) ; v1(60.169,15.457) 60.231,15.519 60.231,17.281 U1.19
  Bottom Layer w0.2: v1(57.023,12.319) 57.031,12.319 v1@60.168,15.457
MOT: U1.29 U2.2 | length 10.3
  Top Layer w0.2: U1.29 65.438,20.75 65.647,20.959 v1(65.782,20.959) ; v1(73.025,20.955) 74.132,20.955 74.286,21.109 U2.2
  Bottom Layer w0.2: v1(65.782,20.959) 65.784,20.957 73.023,20.957 v1(73.025,20.955)
NEO_END: D18.3 NEO_E.TP U1.31 | length 34.8
  Top Layer w0.2: U1.31 66.584,21.75 68.106,23.272 68.106,23.635 69.627,25.157 70.373,25.157 70.9,24.63 70.9,17.243 v1(70.231,16.573) ; D18.3 64.595,3 67.945,6.35 NEO_E.TP@67.945,9.398 ; NEO_E.TP 68.072,10.74 71.501,14.169 v1(71.501,15.113)
  Bottom Layer w0.2: v1@70.231,16.764 v1(70.231,16.573) 70.231,16.383 v1(71.501,15.113)
NEO_ROW2: D8.3 D9.1 | length 4.7
  Top Layer w0.2: D9.1 26.139,40.95 27.089,41.9 28.137,41.9 28.405,41.632 28.405,41.15 D8.3
NEO_ROW3: D16.3 D17.1 | length 4.7
  Top Layer w0.2: D16.3 53.195,1.85 53.195,1.368 53.463,1.1 54.511,1.1 55.461,2.05 D17.1
NEOPX: D2.1 NEOPX.TP U1.41 | length 23.5
  Top Layer w0.254: U1.41 60.75,26.784 60.786,26.82 60.786,37.248 62.226,38.689 63.561,38.689 ; D2.1 65.207,40.627 65.207,40.334 63.561,38.689 ; NEOPX.TP@68.284,36.788 66.384,38.689 63.561,38.689
NetC4_2: C4.2 U1.1 | length 2.8
  Top Layer w0.2: C4.2 54.61,24.89 55.25,24.25 U1.1
NetD2_3: D2.3 D3.1 | length 4.7
  Top Layer w0.2: D3.1 60.939,40.95 61.889,41.9 62.937,41.9 63.205,41.632 63.205,41.15 D2.3
NetD3_3: D3.3 D4.1 | length 4.7
  Top Layer w0.2: D4.1 55.139,40.95 56.089,41.9 57.137,41.9 57.405,41.632 57.405,41.15 D3.3
NetD4_3: D4.3 D5.1 | length 4.7
  Top Layer w0.2: D5.1 49.339,40.95 50.289,41.9 51.337,41.9 51.605,41.632 51.605,41.15 D4.3
NetD5_3: D5.3 D6.1 | length 4.7
  Top Layer w0.2: D6.1 43.539,40.95 44.489,41.9 45.537,41.9 45.805,41.632 45.805,41.15 D5.3
NetD6_3: D6.3 D7.1 | length 4.7
  Top Layer w0.2: D7.1 37.739,40.95 38.689,41.9 39.737,41.9 40.005,41.632 40.005,41.15 D6.3
NetD7_3: D7.3 D8.1 | length 4.7
  Top Layer w0.2: D8.1 31.939,40.95 32.889,41.9 33.937,41.9 34.205,41.632 34.205,41.15 D7.3
NetD9_3: D9.3 D10.1 | length 47.2
  Top Layer w0.381: D10.1 21.87,2.25 22.3,2.679 22.3,2.862 25.788,6.35 v1(28.956,6.35) ; D9.3 22.805,38.79 v1(23.622,37.973)
  Bottom Layer w0.381: v1(23.622,37.973) 23.622,31.073 29.445,25.251 29.445,18.351 28.342,17.249 28.342,11.933 28.956,11.32 v1(28.956,6.35)
NetD10_3: D10.3 D11.1 | length 4.7
  Top Layer w0.2: D10.3 24.195,1.85 24.195,1.368 24.463,1.1 25.511,1.1 26.461,2.05 D11.1
NetD11_3: D11.3 D13.1 | length 4.7
  Top Layer w0.2: D11.3 29.995,1.85 29.995,1.368 30.263,1.1 31.311,1.1 32.261,2.05 D13.1
NetD12_A: D12.A R6.2 U3.1 | length 17.7
  Top Layer w0.2: R6.2 35.65,12.05 36.997,13.397 U3.1
  Bottom Layer w0.35: U3.1 37.239,15.328 38.603,16.692 46.271,16.692 47.913,18.334 47.913,19.913 D12.A
NetD12_K: D12.K R9.1 | length 10.1
  Top Layer w0.35: R9.1 v1(49.911,30.734)
  Bottom Layer w0.254: D12.K D12.K@48.495,23.495
  Bottom Layer w0.35: D12.K@48.495,23.495 49.045,23.495 49.325,23.775 49.325,30.083 49.911,30.669 v1(49.911,30.734)
NetD13_3: D13.3 D14.1 | length 4.7
  Top Layer w0.2: D13.3 35.795,1.85 35.795,1.368 36.063,1.1 37.111,1.1 38.061,2.05 D14.1
NetD14_3: D14.3 D15.1 | length 4.7
  Top Layer w0.2: D14.3 41.595,1.85 41.595,1.368 41.863,1.1 42.911,1.1 43.861,2.05 D15.1
NetD15_3: D15.3 D16.1 | length 4.7
  Top Layer w0.2: D15.3 47.395,1.85 47.395,1.368 47.663,1.1 48.711,1.1 49.661,2.05 D16.1
NetD17_3: D17.3 D18.1 | length 4.7
  Top Layer w0.2: D17.3 58.995,1.85 58.995,1.368 59.263,1.1 60.311,1.1 61.261,2.05 D18.1
NetE1_1: E1.1 U3.3 | length 28
  Top Layer w0.2: E1.1 18.111,14.097 26.67,14.097 v1(29.083,16.51)
  Bottom Layer w0.2: v1(29.083,16.51) 30.48,16.51 32.893,14.097 40.132,14.097 40.176,14.053 40.46,14.337 40.46,14.433 40.997,14.97 U3.3
NetE1_2: E1.2 U3.4 | length 27.4
  Top Layer w0.2: E1.2 19,12.777 19.92,13.697 27.667,13.697 29.83,15.86 v1(29.845,15.86)
  Bottom Layer w0.2: v1(29.845,15.86) 29.86,15.86 32.385,13.335 41.004,13.335 U3.4
NetJ1_A5: J1.A5 R1.2 | length 9.3
  Top Layer w0.2: R1.2 5.588,29.733 5.588,24.171 6.488,23.271 6.488,22.976 6.664,22.8 7.313,22.8 J1.A5
NetJ1_B5: J1.B5 R2.2 | length 11.9
  Top Layer w0.2: R2.2 4.699,21.971 4.11,21.382 4.11,20.751 5.112,19.75 J1.B5
NetJ4_1: J4.1 R11.2 | length 12.9
  Top Layer w0.2: J4.1 39.034,7.522 39.034,8.143 44.288,13.397 R11.2
NetJ4_2: J4.2 R12.2 | length 11.8
  Top Layer w0.2: J4.2 39.555,7.543 39.555,8.099 43.353,11.897 R12.2
NetJ4_3: J4.3 R13.2 | length 10.6
  Top Layer w0.2: J4.3 40.055,7.543 40.055,8.033 42.419,10.397 R13.2
NetJ4_4: J4.4 R14.2 | length 9.5
  Top Layer w0.2: J4.4 40.555,7.543 40.555,7.967 41.485,8.897 R14.2
NetJ4_5: J4.5 R15.2 | length 8.2
  Top Layer w0.2: J4.5 41.005,7.447 41.055,7.397 R15.2
NetM1_2: M1.2 U2.1 | length 3.3
  Top Layer w0.381: M1.2 76.272,24.185 76.272,21.253 U2.1
NetR6_1: R6.1 SW_M.2 | length 25.6
  Top Layer w0.2: SW_M.2 21.703,31.166 22.8,31.166 31.115,22.851 v1(31.115,17.272) ; v1(33.782,14.986) 33.782,12.618 34.35,12.05 R6.1
  Bottom Layer w0.2: v1(31.115,17.272) 33.305,15.082 33.686,15.082 v1(33.782,14.986)
NetR7_1: R7.1 R8.1 R9.2 R10.2 U3.5 | length 37.7
  Top Layer w0.254: R7.1 33.005,9.91 32.714,10.201 32.71,10.201 31.765,11.146 R8.1 31.765,14.366 v1(33.401,16.002) ; v1(33.528,26.416) 33.543,26.431 33.543,30.719 R10.2 ; R9.2@47.356,30.684 R9.2
  Top Layer w0.35: v1(33.528,26.416) 40.144,26.416 U3.5 44.344,27.672 R9.2@47.356,30.684
  Bottom Layer w0.254: v1(33.401,16.002) 33.465,16.065 33.465,26.352 v1(33.528,26.416)
NetR8_2: R8.2 SW_L.2 | length 15.4
  Top Layer w0.2: SW_L.2 21.334,3.3 25.527,7.493 v1(27.813,7.493) ; v1@27.813,9.398 v1(27.863,9.398) 27.913,9.398 30.465,11.95 R8.2
  Bottom Layer w0.2: v1(27.813,7.493) 27.838,7.518 27.838,9.373 v1(27.863,9.398)
NetR10_1: R10.1 SW_R.1 | length 18.7
  Top Layer w0.2: SW_R.1 23.432,36.068 v1(25.019,36.068) ; v1(25.019,32.639) 27.559,30.099 31.623,30.099 R10.1
  Bottom Layer w0.2: v1(25.019,32.639) v1(25.019,36.068)
NetSK_TP: SK.TP U1.37 | length 3.3
  Top Layer w0.2: U1.37 64.308,25.7 SK.TP
NetSO_TP: SO.TP U1.34 | length 3.1
  Top Layer w0.2: U1.34 66.54,23.25 66.912,23.622 SO.TP
NetSp1_TP: Sp1.TP U1.28 | length 7.5
  Top Layer w0.2: U1.28 65.993,20.25 Sp1.TP
NetSp2_TP: Sp2.TP U1.27 | length 7
  Top Layer w0.2: U1.27 67.144,19.75 Sp2.TP
NetSp3_TP: Sp3.TP U1.26 | length 6.5
  Top Layer w0.2: U1.26 68.295,19.25 Sp3.TP
NetSp4_TP: Sp4.TP U1.25 | length 6
  Top Layer w0.2: U1.25 69.258,18.75 69.812,19.304 Sp4.TP
NetSp5_TP: Sp5.TP U1.40 | length 9.1
  Top Layer w0.2: U1.40 61.269,25.719 61.269,26.537 62.687,27.955 63.413,27.955 66.582,31.123 67.445,31.123 Sp5.TP
NetSp6_TP: Sp6.TP U1.39 | length 7.9
  Top Layer w0.2: U1.39 61.769,25.719 61.769,26.471 62.853,27.555 63.75,27.555 65.786,29.591 Sp6.TP
NetSp7_TP: Sp7.TP U1.38 | length 6.6
  Top Layer w0.2: U1.38 62.269,25.719 62.269,26.406 62.941,27.077 64.034,27.077 64.897,27.94 Sp7.TP
NRST: C9.2 R5.1 SW3.2 U1.7 | length 16.3
  Top Layer w0.2: v1(54.483,21.209) 54.505,21.231 55.781,21.231 U1.7
  Top Layer w0.25: C9.2 47.792,16.56 49.936,18.704 49.936,19.456 v1(51.689,21.209) v1@51.816,21.336
  Top Layer w0.381: SW3.2 47.3,17.071 47.792,16.579 C9.2@47.792,16.56 ; C9.2 47.855,16.446 50.721,16.446 R5.1
  Bottom Layer w0.25: v1(51.689,21.209) v1(54.483,21.209)
Touch1: J2.1 U1.10 | length 20.8
  Top Layer w0.2: U1.10 55.819,19.769 56.571,19.769 57.638,20.836 57.638,21.084 v1(58.786,22.232)
  Bottom Layer w0.2: v1(58.786,22.232) 58.786,24.978 58.659,25.105 58.659,32.659 J2.1
Touch2: J2.2 U1.11 | length 19.3
  Top Layer w0.2: U1.11 56.842,19.25 58.764,21.172 v1(58.764,21.278)
  Bottom Layer w0.2: v1(58.764,21.278) 58.792,21.278 59.238,21.724 59.38,21.724 60.086,22.43 60.086,32.146 61.875,33.935 61.906,33.935 62.432,34.46 J2.2
Touch3: J2.3 U1.12 | length 17.8
  Top Layer w0.2: U1.12 57.358,18.75 v1(58.863,20.255)
  Bottom Layer w0.2: v1(58.863,20.255) 58.863,20.305 59.298,20.739 59.298,20.893 59.414,21.01 59.414,21.193 60.833,22.612 60.833,30.988 61.55,31.705 62.785,31.705 J2.3
Touch4: J2.4 U1.13 | length 14.9
  Top Layer w0.2: U1.13 57.269,17.319 57.269,18.006 58.296,19.032 58.559,19.032 59.513,19.986 59.513,20.154 59.948,20.589 v1(59.948,20.638)
  Bottom Layer w0.2: v1(59.948,20.638) 60.852,21.543 61.167,21.543 61.976,22.352 61.976,28.519 62.837,29.38 J2.4
Touch5: J3.1 U1.14 | length 14.2
  Top Layer w0.2: U1.14 57.75,10.068 61.817,6.001 J3.1@62.999,6.001
Touch6: J3.2 U1.15 | length 11.7
  Top Layer w0.2: U1.15 58.25,11.6 61.31,8.54 J3.2
Touch7: J3.3 U1.16 | length 9.8
  Top Layer w0.2: U1.16 58.75,12.243 59.913,11.08 J3.3
Touch8: J3.4 U1.17 | length 6.8
  Top Layer w0.2: U1.17 59.269,17.281 59.269,14.645 59.953,13.961 62.659,13.961 J3.4
U/D: R12.1 U1.18 | length 14
  Top Layer w0.2: R12.1 53.807,11.897 v1(56.515,14.605) ; U1.18 59.769,17.319 59.769,18.621 v1(59.817,18.669)
  Bottom Layer w0.2: v1(56.515,14.605) 56.515,15.367 v1(59.817,18.669)
USBD_N: D1.1 D1.5 D1.6 D1.10 J1.A7 J1.B7 U1.32 | length 89.7
  Top Layer w0.2: v1(1.348,20.969) 1.348,19.676 3.117,17.907 3.937,17.907 5.338,16.506 5.338,15.34 6.854,13.824 8.02,13.824 13.558,8.286 38.308,8.286 44.989,14.967 53.333,14.967 55.034,16.668 55.53,16.668 v1(55.626,16.764) ; v1(62.103,20.447) 62.103,20.462 62.626,20.985 62.626,21.362 63.494,22.231 64.181,22.231 U1.32
  Top Layer w0.254: v1(4.76,21.021) 4.822,21.082 6.164,21.082 6.332,21.25 J1.A7 ; v1(5.846,22.875) 5.896,22.875 6.52,22.25 J1.B7
  Bottom Layer w0.2: v1(1.348,20.969) 1.444,21.064 1.715,21.064 1.787,21.136 ; v1(4.76,21.021) 4.665,20.925 4.407,20.925 4.326,20.844 D1.10 D1.1 2.079,20.844 1.787,21.136 ; v1(5.846,22.875) 5.815,22.844 D1.5 2.079,22.844 1.348,22.113 1.348,21.575 1.787,21.136 ; v1(55.626,16.764) 55.739,16.764 55.993,17.018 57.247,17.018 59.548,19.319 60.113,19.319 61.241,20.447 v1(62.103,20.447)
USBD_P: D1.2 D1.4 D1.7 D1.9 J1.A6 J1.B6 U1.33 | length 87.9
  Top Layer w0.2: v1(1.998,21.844) 1.998,19.592 3.283,18.307 4.103,18.307 5.738,16.672 5.738,15.506 7.02,14.224 8.186,14.224 13.724,8.686 37.857,8.686 44.538,15.367 52.959,15.367 v1(55.245,17.653) ; v1(61.968,21.391) 62.031,21.391 63.371,22.731 64.181,22.731 U1.33
  Top Layer w0.254: v1(5.969,20.405) 6.09,20.405 6.313,20.628 6.352,20.628 6.474,20.75 J1.B6 ; v1(5.969,21.844) 6.04,21.773 7.34,21.773 J1.A6
  Bottom Layer w0.2: v1(1.998,21.844) v1@2.286,21.844 ; v1(5.969,20.405) 5.873,20.501 5.873,20.827 5.03,21.671 4.491,21.671 4.164,21.344 D1.9 D1.2 2.478,21.344 2.286,21.536 v1@2.286,21.844 ; v1(5.969,21.844) 5.469,22.344 D1.7 D1.4 2.478,22.344 2.286,22.152 v1@2.286,21.844 ; v1(55.245,17.653) 57.316,17.653 59.382,19.719 59.948,19.719 61.076,20.847 61.424,20.847 v1(61.968,21.391)
pads on no net: E1.mt J1. J1.A8 J1.B8 J1.SH1 J1.SH2 J1.SH3 J1.SH4 J4.MP1 J4.MP2 U1.2 U1.3 U1.4 U1.5 U1.6 U1.22 U1.45 U1.46 U3.20

## Polygon pours and split planes (outlines as drawn)
GND on Bottom Layer "GND_L02_P001" (solid, remove dead copper, pour order 1): 0,13.999 0,29.001 14,43 66,43 80,29.001 80,13.999 66,0 14,0
GND on Top Layer "GND_L01_P000" (solid, remove dead copper, pour order 0): 0,13.999 0,29.001 14,43 66,43 80,29.001 80,13.999 66,0 14,0

## Silkscreen, mask and mechanical layers (free items; w line width, h text height)
Top Overlay:
  lines w0.18: 5.588,30.48 6.223,30.226 ; 5.715,28.702 6.35,28.448 ; 43.307,1.905 43.942,3.556 ; 46.863,14.478 47.498,14.478 47.879,15.367 ; 48.641,21.463 49.403,21.463 49.784,20.828 ; 50.419,25.654 51.308,26.543
  text "CCI_UDES_HackerMouse" at 37.135,35.907 h1.02
  text "RenaudGagnon_2024" at 37.262,34.298 h1.02
  text "BOOT" at 49.835,26.848 h1.02
  text "RST" at 45.517,20.879 h1.02
  text "+3" at 51.613,13.005 h1.02
  text "1" at 47.295,12.751 h1.02
  text "U/D" at 51.486,11.481 h1.02
  text "2" at 47.041,11.227 h1.02
  text "BTN" at 51.486,9.957 h1.02
  text "3" at 47.041,9.83 h1.02
  text "GND" at 51.486,8.433 h1.02
  text "4" at 47.041,8.306 h1.02
  text "5" at 47.041,6.909 h1.02
  text "L/R" at 51.486,6.782 h1.02
Mechanical 1:
  lines w0: 0,13.999 14,0 66,0 80,13.999 80,29.001 66,43 14,43 0,29.001 0,13.999 ; 9,18.537 12.536,14.999 25.464,14.999 29,18.537 29,24.463 25.465,28.001 12.536,28.001 9,24.463 9,18.537
GKO:
  lines w0.254: 0,13.999 14,0 66,0 80,13.999 80,29.001 66,43 14,43 0,29.001 0,13.999 ; 9,18.537 12.536,14.999 25.464,14.999 29,18.537 29,24.463 25.465,28.001 12.536,28.001 9,24.463 9,18.537 ; 34.925,17.145 44.958,17.145 44.958,26.035 34.925,26.035 34.925,17.145
Mechanical 15:
  lines w0.013: -0.926,296.073 0.661,297.661 ; -0.132,295.544 -0.132,298.19 ; -0.132,295.809 0.926,296.867 ; 0.397,295.28 1.455,296.338 ; 0.926,294.751 1.984,295.809
  lines w0.18: -4.45,0 14,0 ; 0,-5.34 0,13.999

## Text inside footprints (layer, text, board x,y; h text height)
J1: Mechanical 13 "PCB EDGE" at 0.256,15.15 h1 r270
U2: Top Overlay "*" at 76.717,21.761 h1.27 r270; Mechanical 13 "*" at 75.625,20.701 h1.27 r270